# EAGLE board stepper-motor-driver (EAGLE 5.01)
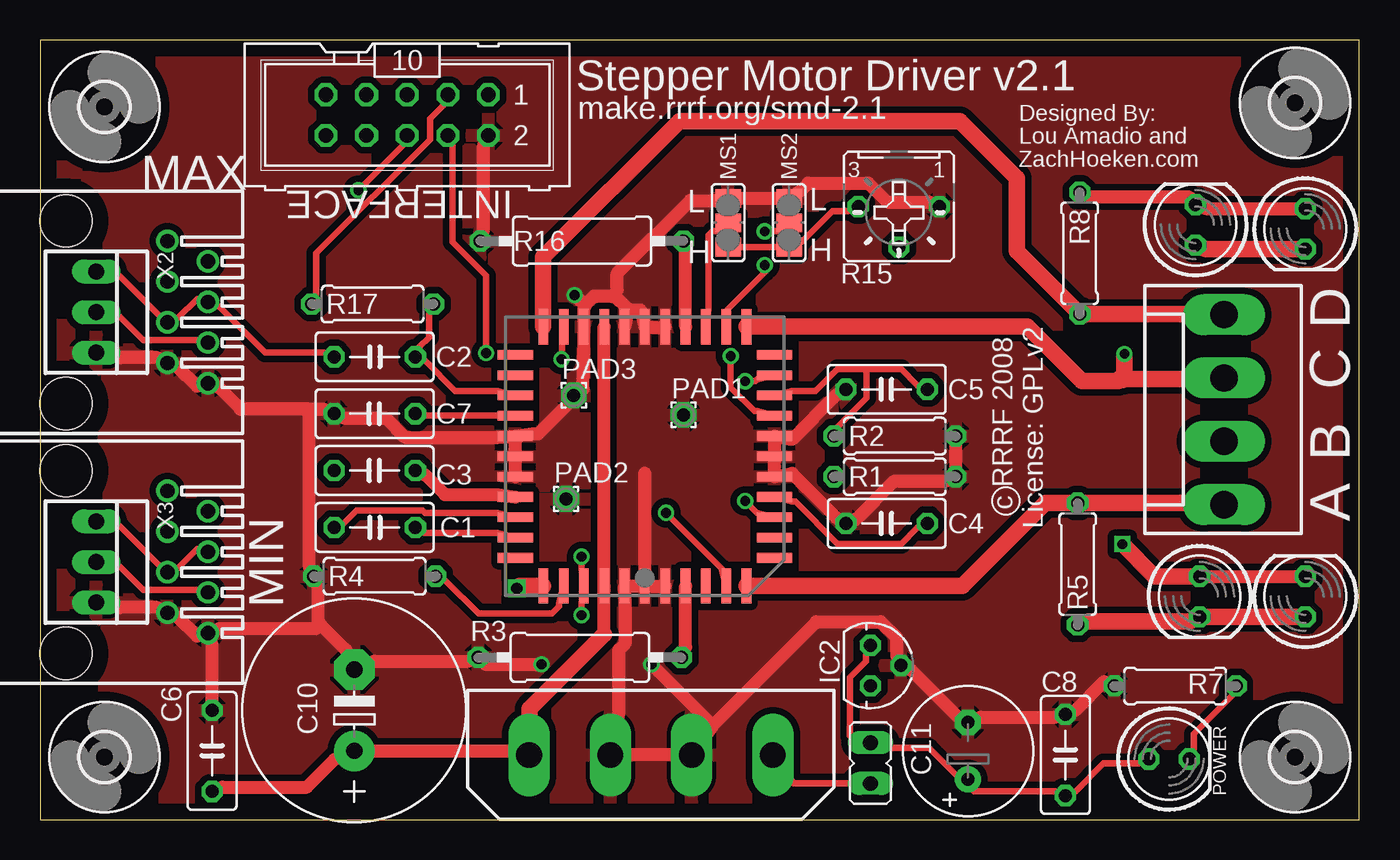
[diagram p0: board, top side]
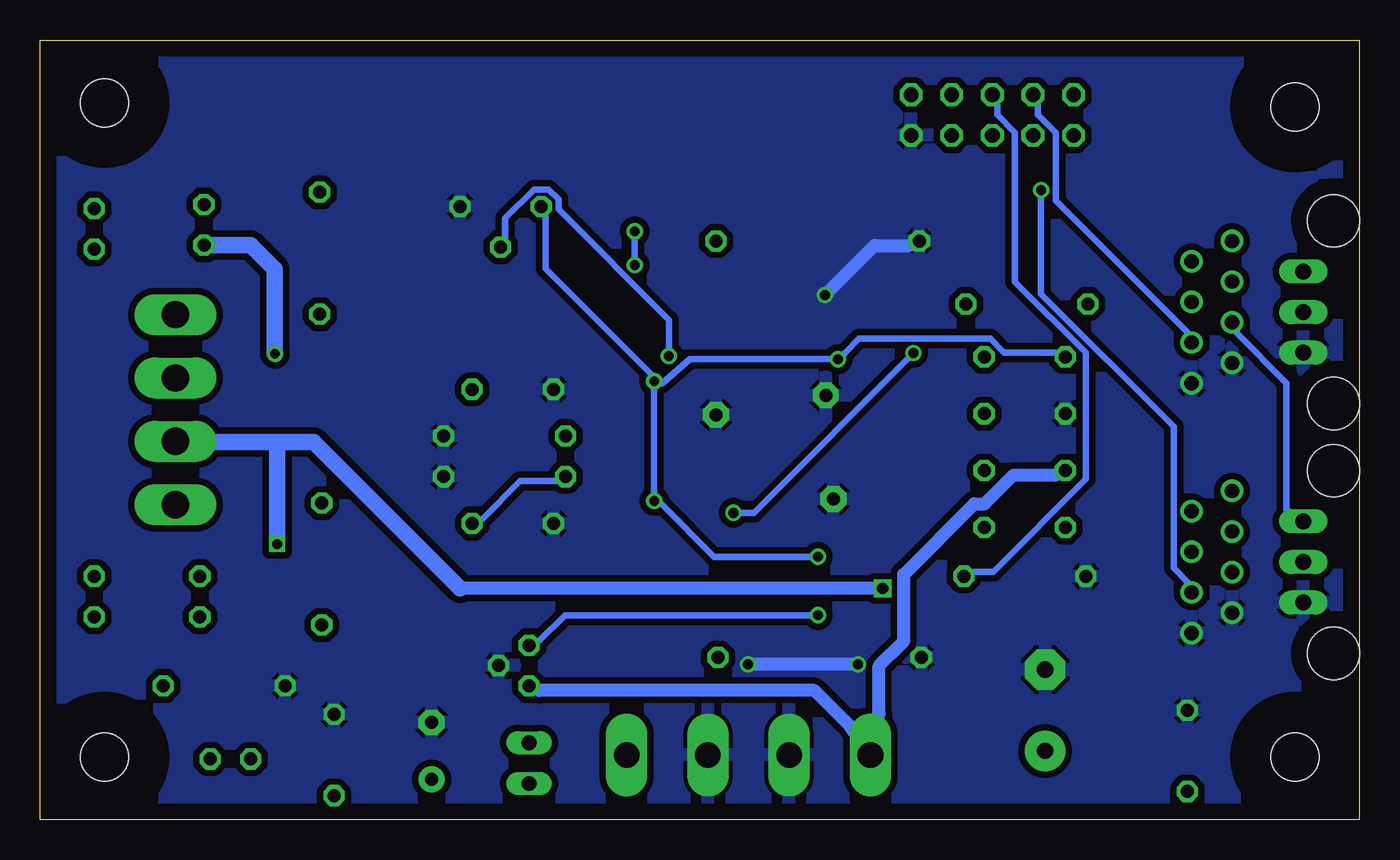
[diagram p1: board, bottom side, seen from below]

Size 82.47 x 48.76 mm. Coordinates in mm from the lower left corner, seen from the top.
Outline: 0,0 82.47,0 82.47,48.76 0,48.76 0,0
Copper layers (1*16): Top 0.035mm / dielectric 1.5mm / Bottom 0.035mm
Design rules "default": minimum track width 10mil, minimum drill 24mil, track to track 8mil, track to pad 8mil, pad to pad 8mil, via to via 8mil, smd to smd 8mil, copper to edge 40mil, drill to drill 8mil, minimum pad ring 10mil, minimum via ring 8mil, stop-mask expansion 4mil, vias tented up to drill 0mil, thermal gap 10mil
Net classes: 0 default: width 0.406 mm; 1 Power: width 0.813 mm, clearance 0.406 mm

## Footprints (pad centres in the part's own frame; a part is rotated, then mirrored left to right if it is on the bottom)
C050-030X075 = drill 0.813 octagon: 1 -2.54,0; 2 2.54,0
E5-13 = drill 1.016 pad 2.54 round: + -2.54,0 | drill 1.016 pad 2.54 octagon: - 2.54,0
E3,5-8 = drill 0.813 pad 1.6 round: + -1.778,0 | drill 0.813 pad 1.6 octagon: - 1.778,0
PLCC44 = smd 0.6 x 2.2: 1 0,8.1; 2 -1.27,8.1; 3 -2.54,8.1; 4 -3.81,8.1; 5 -5.08,8.1; 6 -6.35,8.1; 18 -6.35,-8.1; 19 -5.08,-8.1; 20 -3.81,-8.1; 21 -2.54,-8.1; 22 -1.27,-8.1; 23 0,-8.1; 24 1.27,-8.1; 25 2.54,-8.1; 26 3.81,-8.1; 27 5.08,-8.1; 28 6.35,-8.1; 40 6.35,8.1; 41 5.08,8.1; 42 3.81,8.1; 43 2.54,8.1; 44 1.27,8.1 | smd 2.2 x 0.6: 7 -8.1,6.35; 8 -8.1,5.08; 9 -8.1,3.81; 10 -8.1,2.54; 11 -8.1,1.27; 12 -8.1,0; 13 -8.1,-1.27; 14 -8.1,-2.54; 15 -8.1,-3.81; 16 -8.1,-5.08; 17 -8.1,-6.35; 29 8.1,-6.35; 30 8.1,-5.08; 31 8.1,-3.81; 32 8.1,-2.54; 33 8.1,-1.27; 34 8.1,0; 35 8.1,1.27; 36 8.1,2.54; 37 8.1,3.81; 38 8.1,5.08; 39 8.1,6.35
78LXX = drill 0.813 octagon: GND 0,1.905; IN 1.27,0; OUT -1.27,0
520426-4 = drill 0.889 round: 1 -4.445,6.35; 2 -3.175,8.89; 3 -1.905,6.35; 4 -0.635,8.89; 5 0.635,6.35; 6 1.905,8.89; 7 3.175,6.35; 8 4.445,8.89 | hole 3.251: -5.715,0; 5.715,0
JP1 = drill 0.914 long: 1 0,-1.27; 2 0,1.27
LED5MM = drill 0.813 octagon: A -1.27,0; K 1.27,0
1,6/0,8 = drill 0.813 pad 1.6 octagon: 1 0,0
9090-4V = drill 1.6 pad 2.6 long: 1 -7.62,0; 2 -2.54,0; 3 2.54,0; 4 7.62,0
0207/7 = drill 0.813 octagon: 1 -3.81,0; 2 3.81,0
0309/12 = drill 0.813 octagon: 1 -6.35,0; 2 6.35,0
B25P = drill 0.813 octagon: A -2.54,0; E 2.54,0; S 0,2.54
SJ_2 = smd 1.168 x 1.6: 1 -1.524,0; 2 0,0; 3 1.524,0
ML10 = drill 0.914 octagon: 1 -5.08,-1.27; 2 -5.08,1.27; 3 -2.54,-1.27; 4 -2.54,1.27; 5 0,-1.27; 6 0,1.27; 7 2.54,-1.27; 8 2.54,1.27; 9 5.08,-1.27; 10 5.08,1.27
3,0 = hole 3: 0,0
KK-156-4 = drill 1.7 pad 2.184 long: 1 -5.94,0; 2 -1.98,0; 3 1.98,0; 4 5.94,0
22-23-2031 = drill 1 long: 1 -2.54,0; 2 0,0; 3 2.54,0

## Placement (x,y rotation side)
C1  .22uF  [C050-030X075]  20.92,18.28 0 top
C2  1nF  [C050-030X075]  20.92,28.95 0 top
C3  .22uF  [C050-030X075]  20.92,21.84 180 top
C4  680pF  [C050-030X075]  52.92,18.54 180 top
C5  680pF  [C050-030X075]  52.92,26.92 180 top
C6  100nF  [C050-030X075]  10.76,4.31 90 top
C7  .22uF  [C050-030X075]  20.92,25.39 180 top
C8  100nF  [C050-030X075]  64.1,4.06 90 top
C10  470uF  [E5-13]  19.65,6.85 90 top
C11  100uF  [E3,5-8]  58,4.31 90 top
DRIVER  A3977  [PLCC44]  37.81,22.73 180 top
IC2  78L05  [78LXX]  51.9,9.65 270 top
J1  [520426-4]  1.61,31.74 270 top
J2  [520426-4]  1.61,16.12 270 top
JP1  [JP1]  51.9,3.55 180 top
LED1  [LED5MM]  70.57,3.8 0 top
LED2  [LED5MM]  79.08,13.97 90 top
LED3  [LED5MM]  72.48,13.97 270 top
LED4  [LED5MM]  79.08,36.95 270 top
LED5  [LED5MM]  72.22,37.21 90 top
PAD1  [1,6/0,8]  40.22,25.32 0 top
PAD2  [1,6/0,8]  32.88,20.06 0 top
PAD3  [1,6/0,8]  33.36,26.54 0 top
POWER  9090-4V  [9090-4V]  38.19,4.06 180 top
R1  22K  [0207/7]  53.43,21.46 180 top
R2  22K  [0207/7]  53.43,24 180 top
R3  0.75  [0309/12]  33.74,10.15 180 top
R4  22K  [0207/7]  20.92,15.24 0 top
R5  1K  [0207/7]  64.86,16 270 top
R7  1K  [0207/7]  70.96,8.38 0 top
R8  1K  [0207/7]  64.99,35.43 90 top
R15  10K  [B25P]  53.68,38.35 180 top
R16  0.75  [0309/12]  33.87,36.19 180 top
R17  1K  [0207/7]  20.79,32.25 0 top
SJ1  [SJ_2]  43.02,37.33 270 top
SJ2  [SJ_2]  46.83,37.33 270 top
SV1  [ML10]  22.95,44.06 180 top
U$1  [3,0]  4.03,44.57 0 top
U$2  [3,0]  78.45,44.83 0 top
U$3  [3,0]  4.03,3.93 0 top
U$4  [3,0]  78.45,3.93 0 top
X1  [KK-156-4]  74,25.65 90 top
X2  22-23-2031  [22-23-2031]  3.52,31.74 270 top
X3  22-23-2031  [22-23-2031]  3.52,16.12 270 top

## Library data of the parts
C1-C8 C10 C11 R3 R4 R7 R8 R16 R17 = rcl
DRIVER = linear
IC2 = v-reg
J1 J2 = con-amp
JP1 SJ1 SJ2 = jumper
LED1-LED5 = led
PAD1-PAD3 = wirepad
POWER = con-thomas-betts
R1 R2 R5 = resistor
R15 = pot
SV1 = con-harting-ml
U$1-U$4 = holes
X1-X3 = con-molex

## Nets
A [Power]: DRIVER.6 R5.1 X1.1
B [Power]: DRIVER.40 LED2.K LED3.A X1.2
C [Power]: DRIVER.18 LED4.K LED5.A X1.3
D [Power]: DRIVER.28 R8.1 X1.4
DIR: DRIVER.5 SV1.4
ENABLE: DRIVER.41 R4.2 SV1.5
GND [Power]: C4.2 C5.2 C6.2 C7.2 C8.2 C10.- C11.- DRIVER.1 DRIVER.2 DRIVER.11 DRIVER.12 DRIVER.13 DRIVER.22 DRIVER.23 DRIVER.24 DRIVER.26 DRIVER.33 DRIVER.34 DRIVER.35 DRIVER.44 IC2.GND J1.7 J1.8 J2.7 J2.8 PAD1.1 PAD2.1 PAD3.1 POWER.2 POWER.3 R1.1 R2.1 R3.2 R4.1 R7.1 R15.A R16.2 SJ1.1 SJ2.1 SV1.2 X2.3 X3.3
MAX: J1.6 SV1.7 X2.2
MIN: J2.6 SV1.6 X3.2
MS1: DRIVER.20 SJ1.2
MS2: DRIVER.19 SJ2.2
N$1: C7.1 DRIVER.32
N$2 [Power]: DRIVER.21 R16.1
N$3 [Power]: DRIVER.3 R3.1
N$4 [Power]: C3.1 DRIVER.36
N$5: C1.1 DRIVER.37
N$6: C1.2 DRIVER.38
N$7: C4.1 DRIVER.10 R1.2
N$8: LED1.K R7.2
N$10: LED2.A LED3.K R5.2
N$11: C5.1 DRIVER.15 R2.2
N$12 [Power]: LED4.A LED5.K R8.2
N$13: DRIVER.14 R15.S
N$14: C2.2 DRIVER.31 R17.2
STEP: R17.1 SV1.3
VC+ [Power]: C3.2 C6.1 C10.+ DRIVER.25 DRIVER.43 IC2.IN POWER.4
VCC: C2.1 C8.1 C11.+ DRIVER.9 DRIVER.16 DRIVER.27 DRIVER.42 IC2.OUT J1.4 J1.5 J2.4 J2.5 JP1.1 LED1.A R15.E SJ1.3 SJ2.3 X2.1 X3.1
VCC-IN: JP1.2 POWER.1

## Tracks (layer width: path | path; a pad name or v marks a point on that pad's centre or on a via)
A
  Top 1.016: DRIVER.6 57.65,14.63 62.83,19.81 R5.1 74,19.81 X1.1
B  (via drill 0.6, 0.7)
  Top 0.813: LED3.A LED2.K
  Top 1.016: DRIVER.40 29.96,14.63 v29.81,14.47 | LED3.A 69.66,15.24 v67.65,17.24
  Bottom 0.813: v29.81,14.47 56.22,14.47
  Bottom 1.016: 56.22,14.47 65.37,23.62 67.73,23.62 | 74,23.62 X1.2 74,23.52 73.9,23.62 67.73,23.62 | v67.65,17.24 67.65,23.54 67.73,23.62
C  (via drill 0.6)
  Top 1.016: DRIVER.18 61.71,30.83 65.11,27.43 67.32,27.43 | 67.32,27.43 67.4,27.43 67.65,27.68 | X1.3 74,27.68 73.88,27.55 67.68,27.55 | LED4.K 72.86,35.68 LED5.A | 67.32,27.43 67.32,27.45 67.42,27.55 67.68,27.55 | 67.68,27.55 67.68,27.5 67.78,27.6 v67.78,29.13
  Bottom 1.016: LED5.A 69.3,35.94 67.81,34.44 67.81,29.15 v67.78,29.13
D
  Top 1.016: DRIVER.28 31.46,35.17 39.97,43.68 57.49,43.68 61.05,40.13 61.05,35.55 R8.1 | R8.1 65.11,31.49 | X1.4 74,31.49 73.88,31.62 R8.1
DIR  (via drill 0.61)
  Top 0.406: v39.13,19.2 42.61,15.72 DRIVER.5 | v27.88,29.18 27.88,34.03 25.79,36.11 25.79,42.11 SV1.4
  Bottom 0.406: v39.13,19.2 37.86,19.2 v27.88,29.18
ENABLE
  Top 0.406: DRIVER.41 32.45,13.53 32.45,13.35 31.99,12.9 27.42,12.9 25.36,14.96 R4.2
  Bottom 0.406: SV1.5 22.64,44.65 22.64,44.09 21.53,42.97 21.53,33.62 17.11,29.2 17.11,21.31 22.9,15.51 24.09,15.51 R4.2
GND  (via drill 0.61)
  Top 0.813: R7.1 66.51,8.66 64.73,6.88 C8.2 63.46,6.42 58.79,6.42 C11.- 57.32,6.5 54.45,9.37 IC2.GND 53.53,10.28 53.53,11.4 52.54,12.39 48.53,12.39 42.02,5.89 | DRIVER.1 37.53,14.62 36.82,14.62 DRIVER.44 36.59,13.53 36.59,11.04 36.18,10.64 36.18,6.65 POWER.3 POWER.2 42.02,5.89 | DRIVER.2 38.8,14.6 38.21,14.6 DRIVER.1 | DRIVER.1 37.81,21.66 | R2.1 R1.1 56.6,21.18 53.38,21.18 51.02,18.82 C4.2 49.8,18.87 47,21.66 DRIVER.11 45.91,21.74 45.91,22.45 DRIVER.12 45.94,23.13 45.94,23.72 DRIVER.13 47,23.8 49.8,26.59 C5.2 | 16.83,25.67 12.54,25.67 11.19,27.02 J1.8 9.82,27.12 8.65,28.29 J1.7 7.33,28.9 5.02,28.9 X2.3 | 16.83,25.67 17.74,25.67 C7.2 19.01,25.12 21.63,25.12 22.82,23.92 28.61,23.92 DRIVER.33 | C6.2 10.76,10.99 J2.8 | J2.8 9.82,11.5 8.65,12.67 J2.7 7.33,13.28 5.02,13.28 X3.3 | 17.51,12.24 19.11,10.64 C10.- 20.89,9.93 26.76,9.93 R3.2 27.88,9.72 v31.36,9.72 | 17.51,12.24 17.39,12.37 17.39,14.6 R4.1 16.83,15.87 16.83,25.67 | J2.8 11.19,11.96 17.23,11.96 17.51,12.24 | R15.A 55.59,38.63 52.97,38.63 51.78,39.82 48.02,39.82 47.61,39.42 SJ2.1 SJ1.1 42.23,38.73 40.65,38.73 36.08,34.16 36.08,33.14 35.9,32.76 | R16.2 27.72,36.82 27.72,42.11 SV1.2 | DRIVER.35 29.7,21.74 29.7,22.45 DRIVER.34 29.68,23.13 29.68,23.72 DRIVER.33 | 34.15,32.28 34,31.92 DRIVER.26 34,29.74 33.95,26.94 31.15,24.15 30.8,24.15 DRIVER.33 | 34.15,32.28 34.63,32.76 35.9,32.76 | 35.9,32.76 36.74,31.92 | 36.74,31.92 DRIVER.24 | 36.74,31.92 37.15,31.9 37.53,31.9 DRIVER.23 38.24,30.78 38.8,30.78 DRIVER.22 | v33.41,32.81 33.77,32.46 34.15,32.28 | v38.21,9.72 41.74,6.19 42.02,5.89
  Bottom 0.813: v33.41,32.81 30.31,35.91 28.16,35.91 R16.2 | v31.36,9.72 v38.21,9.72
  pour Top: -1.18,50.29 83.91,50.29 83.91,-3.05 -1.18,-3.05
  pour Bottom: -1.18,50.29 83.91,50.29 83.91,-1.78 -1.18,-1.78
MAX
  Top 0.406: J1.6 9.82,29.99 6.46,29.99 5.02,31.44 X2.2
  Bottom 0.406: SV1.7 20.1,44.65 20.1,44.09 18.99,42.97 18.99,38.73 10.78,30.53 J1.6
MIN  (via drill 0.61)
  Top 0.406: J2.6 9.82,14.37 6.46,14.37 5.02,15.82 X3.2 | v19.9,39.36 22.64,42.11 SV1.6
  Bottom 0.406: v19.9,39.36 19.9,32.86 11.62,24.58 11.62,15.74 10.78,14.9 J2.6
MS1
  Top 0.406: SJ1.2 42.23,36.8 42.02,36.8 41.8,36.57 41.8,31.92 DRIVER.20
MS2  (via drill 0.61)
  Top 0.406: v45.3,36.8 46.04,36.8 SJ2.2 | v45.3,34.69 45.3,34.23 42.99,31.92 DRIVER.19
  Bottom 0.406: v45.3,34.69 v45.3,36.8
N$1
  Top 0.406: DRIVER.32 24.09,25.27 C7.1
N$2
  Top 0.813: DRIVER.21 40.35,35.55 R16.1
N$3
  Top 0.813: DRIVER.3 40.35,10.79 R3.1
N$4
  Top 0.813: DRIVER.36 28.61,20.34 25.31,20.34 24.09,21.56 C3.1
N$5
  Top 0.406: DRIVER.37 28.61,19.2 24.07,19.2 23.91,19.35 19.8,19.35 19.01,18.56 C1.1
N$6
  Top 0.406: DRIVER.38 28.61,17.93 24.02,17.93 C1.2
N$7
  Top 0.406: DRIVER.10 47,19.91 47.21,19.91 49.85,17.27 53.84,17.27 54.83,18.26 C4.1
  Bottom 0.406: R1.2 50.25,21.18 52.46,21.18 54.83,18.82 C4.1
N$8
  Top 0.406: LED1.K 72.12,4.44 72.12,5.38 74.49,7.74 R7.2
N$10
  Top 1.016: R5.2 65.49,12.42 71.84,12.42 LED3.K LED2.A
N$11
  Top 0.406: 51.65,28.19 53.84,28.19 54.83,27.2 C5.1 | 51.65,28.19 49.85,28.19 48.48,26.82 47,26.82 DRIVER.15 | R2.2 49.9,24.63 51.65,26.39 51.65,28.19
N$12
  Top 0.813: R8.2 65.62,38.96 71.79,38.96 LED5.K 72.86,38.22 LED4.A
N$13  (via drill 0.61)
  Top 0.406: v43.17,29 43.17,27.05 44.67,25.55 44.82,25.55 DRIVER.14
  Bottom 0.406: v43.17,29 43.17,31.26 50.08,38.17 50.08,38.81 50.69,39.42 51.6,39.42 53.4,37.61 53.4,36.44 R15.S
N$14
  Top 0.406: DRIVER.31 28.61,26.82 25.95,26.82 24.09,28.67 C2.2 23.74,29.59 24.32,30.17 24.32,31.62 R17.2
STEP
  Top 0.406: R17.1 17.26,32.89 17.26,35.43 24.37,42.54 24.37,43.84 25.18,44.65 SV1.3
VC+
  Top 0.813: 35.27,11.6 35.27,14.37 | 35.27,14.37 DRIVER.43 | 35.27,14.37 DRIVER.25 | C6.1 11.39,2.05 16.67,2.05 18.4,3.78 C10.+ 29.27,4.31 POWER.4
  Top 1.016: 35.27,11.6 30.59,6.93 30.59,3.91 30.57,3.93 POWER.4
  Bottom 0.813: C3.2 19.01,21.56 21.63,21.56 23.43,19.76 24.09,19.76 28.49,15.36 28.49,11.17 30.04,9.62 30.04,6.65 POWER.4 31.86,5.89 34.07,8.1 51.27,8.1 IC2.IN
VCC  (via drill 0.61)
  Top 0.406: v33.85,12.8 33.85,13.53 DRIVER.42 33.85,15.72 v33.85,16.45 | LED1.A 68.67,3.53 66.46,3.53 64.73,1.8 C8.1 63.46,1.8 58.38,1.8 C11.+ 57.21,2.87 55.56,4.52 53.3,4.52 JP1.1 50.63,5.25 50.63,8.91 51.63,9.9 51.63,10.28 IC2.OUT | J2.4 9.82,16.94 8.65,15.77 J2.5 7.46,15.92 5.02,18.36 X3.1 | C2.1 17.74,29.23 14.06,29.23 11.19,32.1 J1.4 9.82,32.56 8.65,31.39 J1.5 7.46,31.54 5.02,33.98 X2.1 | SJ1.3 SJ2.3 47.61,36.14 49.54,38.07 50.51,38.07 R15.E | v44.08,19.93 44.82,19.2 DRIVER.9 | v44.08,27.43 44.72,27.43 44.82,27.53 DRIVER.16 | v32.6,28.8 32.63,29.74 DRIVER.27
  Bottom 0.406: v33.85,12.8 49.67,12.8 51.27,11.2 IC2.OUT | X3.1 4.59,19.4 4.59,27.32 7.68,30.42 J1.5 | v44.08,27.43 v44.08,19.93 43.6,19.7 40.35,16.45 v33.85,16.45 | v44.08,27.43 43.6,27.27 41.85,28.8 v32.6,28.8 32.14,29.23 31.28,30.09 23.08,30.09 22.21,29.23 19.01,29.23 C2.1 | R15.E 50.86,37.71 50.86,34.46 44.31,27.91 v44.08,27.43
VCC-IN
  Top 0.406: JP1.2 47.1,2.28 POWER.1

## Text on the board
tPlace: Stepper Motor Driver v2.1 | make.rrrf.org/smd-2.1 | Designed By: | Lou Amadio and | MS1 | MS2 | ZachHoeken.com | MAX | INTERFACE | L | L | H | H | License: GPLv2 | c RRRF 2008 | D | C | B | MIN | A | POWER